# Altium PCB PCB_SOLDER_HOTAIR_STATION_V1.0_06052016.PcbDoc (part 2 of 2)
Units mil, origin at the board's own origin, x right, y up, seen from the top; angles counter-clockwise.
Board outline 3402 x 1915 mil, 2 copper layers (Top Layer, Bottom Layer); 77 components, 65 nets, 244 pads, 86 vias.
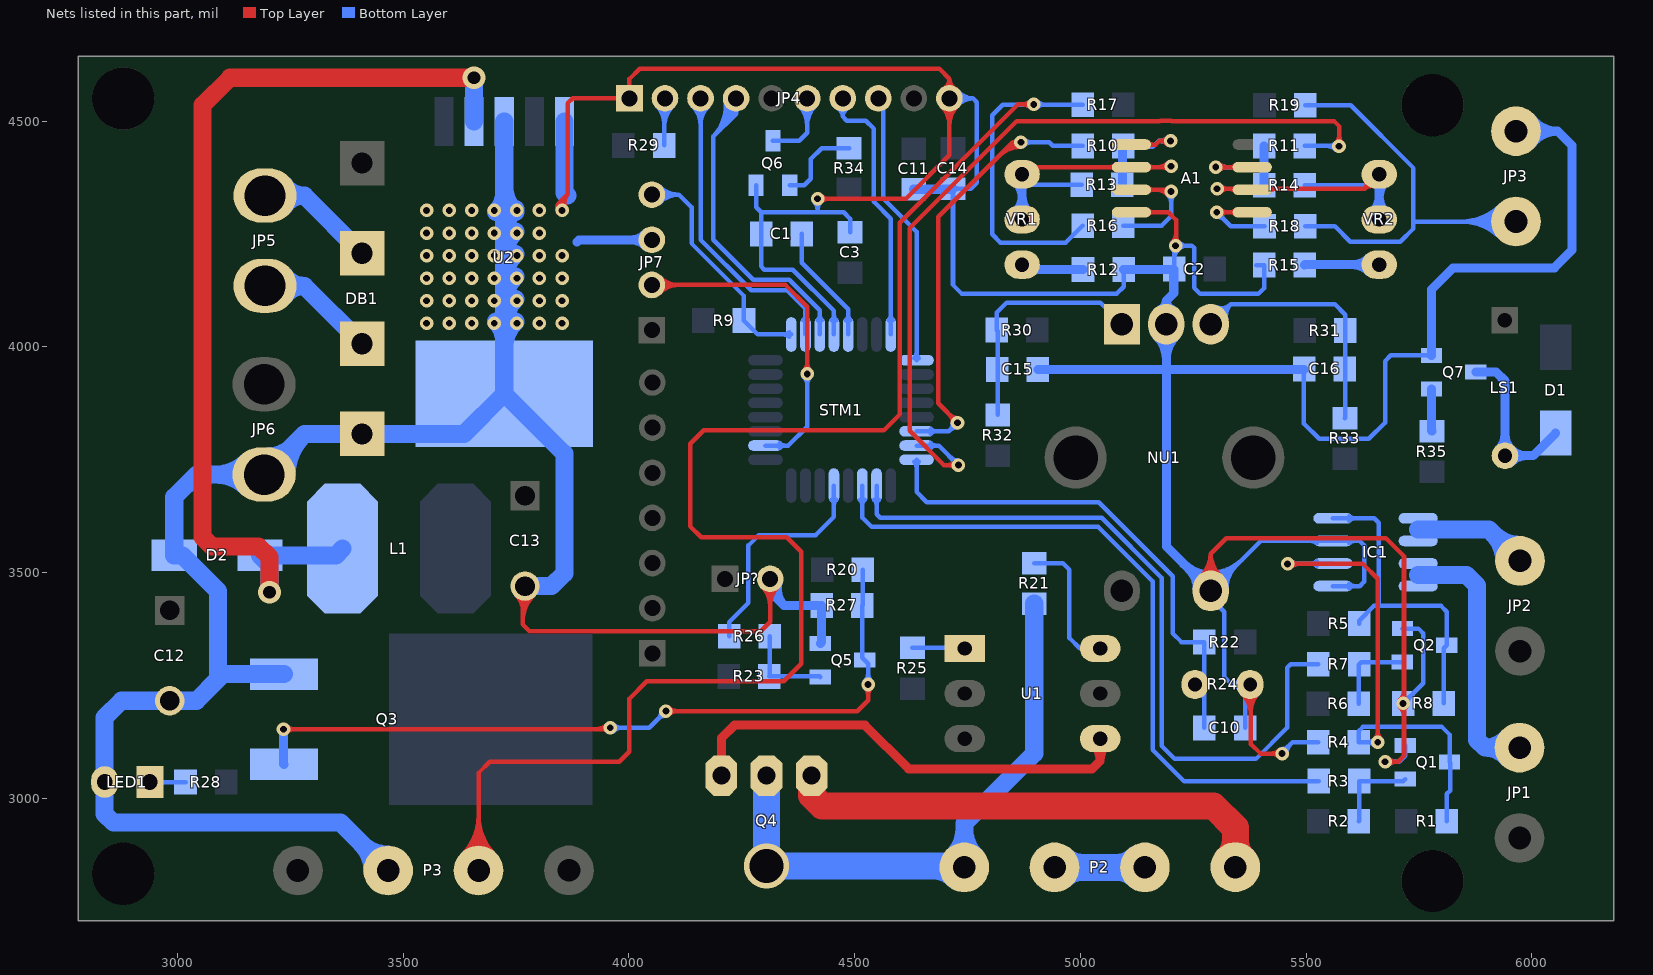
[diagram p2: the nets of this part, all layers, seen from the top]

## Via types
v1: diameter 30, hole 15, Top Layer to Bottom Layer, tented both sides, 84 vias
v2: diameter 50, hole 28, Top Layer to Bottom Layer, tented both sides, 2 vias

## Nets (pads, with @x,y where several pads share a name; then routed paths per layer and width w, separated by ;. In a path a pad name is that pad's centre, name@x,y a point inside that pad or via, vN(x,y) a via of type N, cw(c..) or ccw(c..) an arc to the next point about the centre after c; other vN are vias at no path point) (continued)
GND: A1.4 C1.2 C2.2 C3.2 C10.1 C11.1 C12.2 C13.2 C14.1 C15.2 C16.2 D2.1 DB1.4 IC1.1 IC1.3 JP3.1 JP4.1 JP4.10 JP6.2 JP7.3 JP?.2 LED1.2 NU1.2 NU1.5 P3.2 Q1.3 Q2.3 Q3.3 Q5.3 Q6.3 Q7.3 R4.2 R8.2 R12.2 R15.2 R24.2 R27.2 STM1.4 U2.3 U2.5 U2.6 | length 18137.3
  Top Layer w10: C13.2@3750.55,3450.55 cw(c3715.68,3415.68) 3765,3415.68 cw(c3824.32,3415.68) C13.2@3782.37,3457.63 ; 3765,3391.54 cw(c3848.46,3391.54) C13.2@3789.45,3450.55 ; C13.2@3770,3470 3765,3465 3765,3385 3780,3370 4292,3370 4313,3391 JP?.2@4313,3486 ; v1@3843.28,4297.1 cw(c3859.48,4306.2) 3846.34,4319.34 ; 3848,4321 3865,4338 ; v1(3852,4302) cw(c3871.43,4312.91) 3855.67,4328.67 ; v1@3860.72,4306.9 cw(c3883.37,4319.62) 3865,4338 ; JP?.2@4295.66,3468.66 cw(c4253.79,3426.79) 4313,3426.79 cw(c4372.21,3426.79) JP?.2@4330.34,3468.66 ; JP?.2@4302.73,3475.73 cw(c4277.93,3450.93) 4313,3450.93 cw(c4348.07,3450.93) JP?.2@4323.27,3475.73 ; v1(4418,4328) 4614,4328 4710.03,4424.03 JP4.10@4710.03,4550.37 4710.03,4593.97 ; v1@4425.07,4320.93 cw(c4442.14,4303.86) 4442.14,4328 cw(c4442.14,4352.14) v1@4425.07,4335.07 ; JP4.10@4692.69,4533.03 cw(c4650.82,4491.16) 4710.03,4491.16 cw(c4769.25,4491.16) JP4.10@4727.38,4533.03 ; JP4.10@4697.3,4571.33 ccw(c4683.55,4593.97) 4710.03,4593.97 ; JP4.10@4699.76,4540.1 cw(c4674.96,4515.3) 4710.03,4515.3 cw(c4745.1,4515.3) JP4.10@4720.3,4540.1 ; JP4.10@4722.77,4571.33 cw(c4736.51,4593.97) 4710.03,4593.97 ; A1.4@5113.14,4298 5195,4298 5212,4281 5212,4225 v1(5211,4224) ; A1.4@5149.45,4293.18 cw(c5161.08,4281.56) 5161.08,4298 cw(c5161.08,4314.44) A1.4@5149.45,4302.82 ; v1@5203.93,4231.07 ccw(c5184.44,4250.56) 5212,4250.56 ; 5212,4245.73 ccw(c5232.73,4245.73) v1@5218.07,4231.07 ; NU1.5@5265.73,3490.73 ccw(c5220.77,3541.85) 5288.85,3541.85 ; NU1.5@5272.34,3483.22 ccw(c5240.22,3519.73) 5288.85,3519.73 ccw(c5337.48,3519.73) NU1.5@5305.36,3483.22 ; NU1.5@5288.85,3459.45 5288.85,3541.85 ; NU1.5@5311.97,3490.73 cw(c5356.93,3541.85) 5288.85,3541.85 ; R24.2@5358.32,3231.82 cw(c5310.82,3184.32) 5378,3184.32 ; R24.2@5365.39,3238.89 cw(c5334.96,3208.46) 5378,3208.46 ; R24.2@5376,3252 5378,3250 5378,3120 5399,3099 v1(5447,3099) ; 5378,3193.97 cw(c5431.53,3193.97) R24.2@5393.68,3231.82 ; 5378,3218.12 cw(c5407.38,3218.12) R24.2@5386.61,3238.89 ; v1@5439.93,3091.93 ccw(c5422.86,3074.86) 5422.86,3099 ccw(c5422.86,3123.14) v1@5439.93,3106.07 ; v1(5675,3081) 5704,3081 5717,3094 5717,3536 5677,3576 5323,3576 5288.85,3541.85 ; v1@5682.07,3073.93 cw(c5699.14,3056.86) 5699.14,3081 cw(c5699.14,3105.14) v1@5682.07,3088.07 ; v1@5707.93,3202.93 cw(c5686.03,3181.03) 5717,3181.03 ; v1@5707.93,3217.07 ccw(c5686.03,3238.97) 5717,3238.97 ; 5717,3190.69 cw(c5734.31,3190.69) v1@5722.07,3202.93 ; 5717,3229.31 ccw(c5734.31,3229.31) v1@5722.07,3217.07 ; 3865,4338 3865,4540 3875.37,4550.37 JP4.1@4001.37,4550.37 4001.37,4593.37 4024,4616 4688,4616 4710.03,4593.97
  Bottom Layer w10: Q6.3@4282,4358 4282,4309 4293,4298 ; v1@4410.93,4320.93 cw(c4393.86,4303.86) 4418,4303.86 cw(c4442.14,4303.86) v1@4425.07,4320.93 ; v1(4418,4328) 4418,4298 ; STM1.4@4449.44,4058.71 ccw(c4437.81,4070.34) 4454.25,4070.34 ccw(c4470.7,4070.34) STM1.4@4459.07,4058.71 ; STM1.4@4454.25,4027.32 4454.25,4079.75 4363,4171 4300,4171 4293,4178 C1.2@4293,4250 4293,4298 ; C3.2@4490,4254 4490,4284 4476,4298 4418,4298 ; JP4.10@4710.03,4550.37 4762.26,4550.37 ; C14.1@4714.46,4346.46 cw(c4705.93,4337.93) 4718,4337.93 cw(c4730.07,4337.93) 4721.54,4346.46 cw(c4730.07,4337.93) 4730.07,4350 cw(c4730.07,4362.07) C14.1@4721.54,4353.54 ; JP4.10@4721.21,4541.09 cw(c4740.96,4524.7) 4740.96,4550.37 cw(c4740.96,4576.04) JP4.10@4721.21,4559.65 ; JP4.10@4728.91,4534.71 cw(c4762.26,4507.03) 4762.26,4550.37 ; JP4.10@4728.91,4566.03 ccw(c4762.26,4593.71) 4762.26,4550.37 ; R12.2@5092.46,4167.46 cw(c5083.93,4158.93) 5096,4158.93 cw(c5108.07,4158.93) R12.2@5099.54,4167.46 ; R12.2@5096,4171 5096,4133 5081,4118 4737,4118 4718,4137 C14.1@4718,4350 4757,4350 4770.63,4363.63 4770.63,4542 4762.26,4550.37 ; v1@5203.93,4216.93 cw(c5194.1,4207.1) 5208,4207.1 ; C2.2@5208,4172 5208,4221 v1(5211,4224) 5247,4224 5252,4219 5252,4131 5266,4117 5394,4117 5407,4130 R15.2@5407,4181 R15.2@5390,4181 ; C2.2@5208,4192.62 cw(c5242.38,4192.62) 5218.07,4216.93 cw(c5235.14,4199.86) 5235.14,4224 cw(c5235.14,4248.14) v1@5218.07,4231.07 ; NU1.5@5285.31,3455.91 cw(c5276.78,3447.38) 5288.85,3447.38 cw(c5300.92,3447.38) NU1.5@5292.39,3455.91 ; NU1.5@5288.85,3464.45 ccw(c5288.85,3476.52) 5297.39,3467.98 ccw(c5305.92,3459.45) NU1.5@5293.85,3459.45 ; NU1.5@5288.85,3479.45 ccw(c5288.85,3527.73) 5322.99,3493.59 ; NU1.5@5288.85,3489.45 ccw(c5288.85,3561.88) 5340.06,3510.66 ; NU1.5@5288.85,3499.45 ccw(c5288.85,3596.02) 5357.13,3527.73 ; NU1.5@5313.85,3464.45 cw(c5362.13,3464.45) 5327.99,3498.59 ; NU1.5@5323.85,3464.45 cw(c5396.28,3464.45) 5345.06,3515.66 ; R24.2@5353.77,3240.55 ccw(c5335,3230.88) 5335,3252 ; R24.2@5353.77,3263.45 cw(c5335,3273.12) 5335,3252 ; C10.1@5365,3156 5365,3241 R24.2@5376,3252 5335,3252 ; v1(5447,3099) 5447,3101 5470,3124 R4.2@5527,3124 ; v1@5447,3109 ccw(c5447,3128.31) 5460.66,3114.66 ; v1@5457,3099 cw(c5485.97,3099) 5465.49,3119.49 ; C16.2@5491.46,3946.46 cw(c5482.93,3937.93) 5495,3937.93 cw(c5507.07,3937.93) C16.2@5498.54,3946.46 ; C16.2@5495,3950 5495,3830 5529,3796 5639,3796 5675,3832 5675,3968 5688,3981 Q7.3@5778,3981 ; IC1.3@5523.2,3565.18 ccw(c5511.57,3553.56) 5511.57,3570 ccw(c5511.57,3586.44) IC1.3@5523.2,3574.82 ; IC1.1@5559.51,3470 5619,3470 5629,3480 5629,3560 5619,3570 IC1.3@5559.51,3570 5399.4,3570 NU1.5@5288.85,3459.45 5288.85,3443.15 5319,3413 5319,3268 5335,3252 ; IC1.1@5595.82,3465.18 cw(c5607.45,3453.56) 5607.45,3470 cw(c5607.45,3486.44) IC1.1@5595.82,3474.82 ; IC1.3@5595.82,3565.18 cw(c5607.45,3553.56) 5607.45,3570 cw(c5607.45,3586.44) IC1.3@5595.82,3574.82 ; v1(5675,3081) 5707,3081 5719.66,3093.66 Q1.3@5719.66,3117 ; v1@5682.07,3073.93 cw(c5699.14,3056.86) 5699.14,3081 cw(c5699.14,3105.14) v1@5682.07,3088.07 ; Q2.3@5713.66,3376 5749,3376 5760,3365 5760,3255 v1(5715,3210) ; R8.2@5715,3220 ccw(c5715,3244.14) 5732.07,3227.07 ccw(c5749.14,3210) R8.2@5725,3210 ; Q7.3@5774.46,3977.46 ccw(c5765.93,3968.93) 5765.93,3981 ccw(c5765.93,3993.07) Q7.3@5774.46,3984.54 ; 4293,4298 4418,4298
  Bottom Layer w20: 3885,4232 3890,4237 JP7.3@4051,4237 ; JP7.3@4037.19,4223.19 ccw(c4003.86,4189.86) 4003.86,4237 ccw(c4003.86,4284.14) JP7.3@4037.19,4250.81 ; JP?.2@4312.55,3486.15 ccw(c4346.17,3474.95) 4321.11,3449.89 ; JP?.2@4313,3486 4313,3458 4344,3427 ; JP?.2@4331.53,3479.83 ccw(c4380.5,3463.51) 4344,3427 ; Q5.3@4424,3343 4427,3346 R27.2@4427,3427 4344,3427 ; C11.1@4631,4349 4717,4349 C14.1@4718,4350 ; C15.2@4906,3950 5190.43,3950 ; R12.2@5096,4171 5207,4171 5207,4119 5190.43,4102.43 NU1.2@5190.43,4050 5190.43,3950 ; NU1.2@5169.21,4023.79 cw(c5118,3972.57) 5190.43,3972.57 cw(c5262.85,3972.57) NU1.2@5211.64,4023.79 ; NU1.2@5177.57,4082.11 ccw(c5167.94,4102.42) 5190.43,4102.42 ccw(c5212.91,4102.42) NU1.2@5203.28,4082.11 ; 5229.1,3519.2 ccw(c5288.85,3578.95) NU1.5@5288.85,3494.45 ; 5241.17,3507.13 cw(c5198.5,3464.45) NU1.5@5258.85,3464.45 ; NU1.5@5288.85,3459.45 5190.43,3557.87 5190.43,3950 ; C16.2@5495,3950 5190.43,3950 ; Q7.3@5778,3981 5778,4127 5826,4175 6050,4175 6089,4214 6089,4446 6057.5,4477.5 ; JP3.1@5965,4477.5 6057.5,4477.5 ; JP3.1@6000.41,4449.73 cw(c6057.5,4404.94) 6057.5,4477.5 ; JP3.1@6000.41,4505.27 ccw(c6057.5,4550.06) 6057.5,4477.5
  Bottom Layer w40: JP6.2@3153.72,3688.72 ccw(c3085.43,3620.43) 3085.43,3717 ccw(c3085.43,3813.57) JP6.2@3153.72,3745.28 ; JP6.2@3202,3757 ccw(c3202,3829.43) 3253.21,3778.21 ; Q3.3@3236.13,3275 3101,3275 3090,3264 ; JP6.2@3242,3717 cw(c3362.71,3717) 3277.36,3802.36 ; P3.2@3432,2840 ccw(c3347.5,2840) 3407.25,2899.75 ccw(c3467,2959.5) P3.2@3467,2875 ; P3.2@3467,2840 3361,2946 2858,2946 2839,2965 LED1.2@2839,3036 2839,3179 2876,3216 C12.2@2983,3216 3042,3216 3090,3264 ; v1@3705.54,4055.54 cw(c3660.96,4010.96) U2.6@3724,4010.96 ; v1@3705.54,4298.46 ccw(c3660.96,4343.04) 3724,4343.04 ; U2.6@3724,3996.47 cw(c3807.53,3996.47) v1@3748.46,4055.54 ; 3724,4046.47 cw(c3807.53,4046.47) v1@3748.46,4105.54 ; 3724,4096.47 cw(c3807.53,4096.47) v1@3748.46,4155.54 ; 3724,4146.47 cw(c3807.53,4146.47) v1@3748.46,4205.54 ; 3724,4196.47 cw(c3807.53,4196.47) v1@3748.46,4255.54 ; 3724,4246.47 cw(c3807.53,4246.47) v1@3748.46,4305.54 ; 3724,4357.53 ccw(c3807.53,4357.53) v1@3748.46,4298.46 ; U2.3@3724,4499 U2.6@3724,3896.07 ; C13.2@3770,3470 3829,3470 3857,3498 3857,3763.07 U2.6@3724,3896.07 ; U2.5@3857.86,4499 3857.86,4341.14 3864,4335 ; 3090,3264 3090,3459 3011,3538 D2.1@2993,3538 2993,3667 3043,3717 JP6.2@3192,3717 3282,3807 DB1.4@3409,3807 3634.93,3807 U2.6@3724,3896.07
  other v1: 3552,4052 3602,4052 3652,4052 3702,4052 3752,4052 3802,4052 3852,4052 3552,4102 3602,4102 3652,4102 3702,4102 3752,4102 3802,4102 3852,4102 3552,4152 3602,4152 3652,4152 3702,4152 3752,4152 3802,4152 3852,4152 3552,4202 3602,4202 3652,4202 3702,4202 3752,4202 3802,4202 3852,4202 3552,4252 3602,4252 3652,4252 3702,4252 3752,4252 3802,4252 3552,4302 3602,4302 3652,4302 3702,4302 3752,4302 3802,4302
LCD_AO: JP4.4 STM1.3 | length 984.9
  Bottom Layer w10: 4200.94,4479.94 ccw(c4144.87,4536.02) JP4.4@4223.23,4548.15 ; JP4.4@4213.35,4546.62 cw(c4120.73,4532.28) 4187,4466 ; 4214.88,4493.88 ccw(c4169,4539.75) JP4.4@4233.12,4549.68 ; 4228.82,4507.82 ccw(c4193.14,4543.49) JP4.4@4243,4551.21 ; JP4.4@4237.59,4550.37 4237.59,4516.59 4187,4466 ; STM1.3@4417.94,4058.71 ccw(c4406.31,4070.34) 4422.76,4070.34 ccw(c4439.2,4070.34) STM1.3@4427.57,4058.71 ; STM1.3@4422.76,4027.32 4422.76,4081.24 4355.5,4148.5 4275.78,4148.5 4187,4237.28 4187,4466
LCD_CS: JP4.8 STM1.9 | length 641.1
  Bottom Layer w10: JP4.8@4552.55,4550.37 4563,4539.92 4563,4329.28 4637.32,4254.96 STM1.9@4637.32,3970.24 ; STM1.9@4632.51,3975.05 ccw(c4620.88,3986.68) 4637.32,3986.68 ccw(c4653.77,3986.68) STM1.9@4642.14,3975.05
LCD_SCK: JP4.3 STM1.2 | length 839.9
  Bottom Layer w10: JP4.3@4141.51,4533.03 cw(c4099.64,4491.16) 4158.85,4491.16 cw(c4218.06,4491.16) JP4.3@4176.19,4533.03 ; JP4.3@4148.58,4540.1 cw(c4123.78,4515.3) 4158.85,4515.3 cw(c4193.92,4515.3) JP4.3@4169.12,4540.1 ; JP4.3@4158.85,4550.37 4158.85,4237.15 4271,4125 4350.72,4125 4391.26,4084.46 STM1.2@4391.26,4027.32 ; STM1.2@4386.44,4058.71 ccw(c4374.82,4070.34) 4391.26,4070.34 ccw(c4407.7,4070.34) STM1.2@4396.08,4058.71
LCD_SDA: JP4.7 STM1.8 | length 662.8
  Bottom Layer w10: JP4.7@4462.6,4528.55 cw(c4453.17,4510.19) 4473.81,4510.19 ; JP4.7@4473.81,4550.37 4473.81,4510.19 ; JP4.7@4485.02,4528.55 ccw(c4494.46,4510.19) 4473.81,4510.19 ; STM1.8@4575.42,4058.71 ccw(c4563.79,4070.34) 4580.24,4070.34 ccw(c4596.68,4070.34) STM1.8@4585.05,4058.71 ; STM1.8@4580.24,4027.32 4580.24,4283.76 4543,4321 4543,4483 4525,4501 4483,4501 4473.81,4510.19
MCU_FAN: R3.1 STM1.19 | length 1567.6
  Bottom Layer w10: STM1.19@4512.43,3661.29 cw(c4500.8,3649.66) 4517.24,3649.66 cw(c4533.69,3649.66) STM1.19@4522.06,3661.29 ; STM1.19@4517.24,3692.68 4517.24,3621.76 4538,3601 5039.43,3601 5160,3480.43 5160,3107.72 5229.72,3038 R3.1@5528,3038
MCU_FAN_SYS: R7.1 STM1.18 | length 1675.8
  Bottom Layer w10: STM1.18@4543.92,3661.29 cw(c4532.3,3649.66) 4548.74,3649.66 cw(c4565.18,3649.66) STM1.18@4553.56,3661.29 ; STM1.18@4548.74,3692.68 4548.74,3629.26 4557,3621 5047.72,3621 5180,3488.72 5180,3116 5209,3087 5389,3087 5458,3156 5458,3289 5466,3297 R7.1@5527.5,3297
MCU_HEATER: R26.1 STM1.21 | length 529.5
  Bottom Layer w10: R26.1@4222,3359 4222,3390 4265,3433 4265,3560 4288,3583 4414,3583 4454.25,3623.25 STM1.21@4454.25,3692.68 ; STM1.21@4449.44,3661.29 cw(c4437.81,3649.66) 4454.25,3649.66 cw(c4470.7,3649.66) STM1.21@4459.07,3661.29
NetA1_1: A1.1 R10.1 R13.1 | length 407.2
  Top Layer w10: A1.1@5113.14,4448 5167,4448 5175,4456 v1(5200,4456) ; A1.1@5149.45,4443.18 cw(c5161.08,4431.56) 5161.08,4448 cw(c5161.08,4464.44) A1.1@5149.45,4452.82 ; v1@5192.93,4448.93 ccw(c5175.86,4431.86) 5175.86,4456 ccw(c5175.86,4480.14) v1@5192.93,4463.07
  Bottom Layer w10: R10.1@5093,4443 5161,4443 5174,4456 v1(5200,4456) ; R10.1@5096.54,4439.46 cw(c5105.07,4430.93) 5105.07,4443 cw(c5105.07,4455.07) R10.1@5096.54,4446.54 ; v1@5192.93,4448.93 ccw(c5175.86,4431.86) 5175.86,4456 ccw(c5175.86,4480.14) v1@5192.93,4463.07
  Bottom Layer w20: R13.1@5093,4359 R10.1@5093,4443
NetA1_2: A1.2 R13.2 VR1.2 VR1.3 | length 809.8
  Top Layer w10: VR1.3@4871,4382 4887,4398 A1.2@5113.14,4398 5199,4398 v1(5201,4400) ; A1.2@5076.83,4393.18 ccw(c5065.2,4381.56) 5065.2,4398 ccw(c5065.2,4414.44) A1.2@5076.83,4402.82 ; A1.2@5149.45,4393.18 cw(c5161.08,4381.56) 5161.08,4398 cw(c5161.08,4414.44) A1.2@5149.45,4402.82 ; 5172.03,4398 ccw(c5172.03,4428.97) v1@5193.93,4407.07 ; 5181.69,4398 cw(c5181.69,4380.69) v1@5193.93,4392.93
  Bottom Layer w10: VR1.3@4871,4377 cw(c4871,4364.93) 4879.54,4373.46 cw(c4888.07,4382) VR1.3@4876,4382 ; VR1.3@4871,4382 4894,4359 R13.2@5003,4359
  Bottom Layer w20: VR1.2@4855.8,4297.2 ccw(c4819.1,4333.9) 4871,4333.9 ccw(c4922.9,4333.9) VR1.2@4886.2,4297.2 ; VR1.3@4855.8,4366.8 cw(c4819.1,4330.1) 4871,4330.1 ; VR1.2@4871,4282 VR1.3@4871,4382
NetA1_3: A1.3 R16.1 | length 360.9
  Top Layer w10: A1.3@5113.14,4348 5187,4348 5191,4344 v1(5201,4344) ; A1.3@5149.45,4343.18 cw(c5161.08,4331.56) 5161.08,4348 cw(c5161.08,4364.44) A1.3@5149.45,4352.82 ; 5167.2,4348 cw(c5167.2,4310.2) v1@5193.93,4336.93 ; 5186.51,4348 ccw(c5186.51,4358.49) v1@5193.93,4351.07
  Bottom Layer w10: R16.1@5095,4268 5180,4268 5201,4289 v1(5201,4344) ; v1@5193.93,4336.93 cw(c5176.86,4319.86) 5201,4319.86 cw(c5225.14,4319.86) v1@5208.07,4336.93
NetA1_5: A1.5 R18.1 | length 299.4
  Top Layer w10: v1(5302,4298) A1.5@5380.86,4298 ; v1@5309.07,4290.93 cw(c5326.14,4273.86) 5326.14,4298 cw(c5326.14,4322.14) v1@5309.07,4305.07 ; A1.5@5344.55,4293.18 ccw(c5332.92,4281.56) 5332.92,4298 ccw(c5332.92,4314.44) A1.5@5344.55,4302.82
  Bottom Layer w10: v1@5302,4288 cw(c5302,4263.86) 5319.07,4280.93 cw(c5336.14,4298) v1@5312,4298 ; v1(5302,4298) 5333,4267 R18.1@5408,4267
NetA1_6: A1.6 R14.2 VR2.2 VR2.3 | length 903
  Top Layer w10: v1(5303,4350) 5630,4350 ; v1@5310.07,4342.93 cw(c5327.14,4325.86) 5327.14,4350 cw(c5327.14,4374.14) v1@5310.07,4357.07 ; 5328.09,4350 cw(c5328.09,4326.73) A1.6@5344.55,4343.18 ; A1.6@5417.17,4343.18 cw(c5433.63,4326.73) 5433.63,4350 ; VR2.3@5631.87,4367.62 cw(c5620.03,4359.97) 5630,4350 ; VR2.3@5649.25,4355.96 ccw(c5645.27,4334.73) 5630,4350 ; VR2.3@5662,4382 5630,4350
  Bottom Layer w10: R14.2@5497,4358 5638,4358 VR2.3@5662,4382 ; VR2.3@5657,4382 cw(c5644.93,4382) 5653.46,4373.46 cw(c5662,4364.93) VR2.3@5662,4377
  Bottom Layer w20: VR2.2@5646.8,4297.2 ccw(c5610.1,4333.9) 5662,4333.9 ccw(c5713.9,4333.9) VR2.2@5677.2,4297.2 ; VR2.2@5662,4282 VR2.3@5662,4382 ; 5662,4330.1 cw(c5713.9,4330.1) VR2.3@5677.2,4366.8
NetA1_7: A1.7 R11.2 R14.1 | length 381.5
  Top Layer w10: v1(5300,4398) A1.7@5380.86,4398 ; v1@5307.07,4390.93 cw(c5324.14,4373.86) 5324.14,4398 cw(c5324.14,4422.14) v1@5307.07,4405.07 ; A1.7@5344.55,4393.18 ccw(c5332.92,4381.56) 5332.92,4398 ccw(c5332.92,4414.44) A1.7@5344.55,4402.82
  Bottom Layer w10: v1(5300,4398) 5393,4398 5405,4410 5407,4410 ; v1@5307.07,4390.93 cw(c5324.14,4373.86) 5324.14,4398 cw(c5324.14,4422.14) v1@5307.07,4405.07
  Bottom Layer w20: R14.1@5407,4358 5407,4410 R11.2@5407,4445
NetC1_1: C1.1 STM1.5 | length 291.1
  Bottom Layer w10: C1.1@4383,4250 4383,4186 4485.75,4083.25 STM1.5@4485.75,4027.32 ; STM1.5@4480.93,4058.71 ccw(c4469.3,4070.34) 4485.75,4070.34 ccw(c4502.19,4070.34) STM1.5@4490.56,4058.71
NetC15_1: C15.1 NU1.1 R30.2 R32.2 | length 533.8
  Bottom Layer w10: R32.2@4817,3849 4817,4035 R30.2@4815,4037 4815,4076 4837,4098 5044,4098 NU1.1@5092,4050
NetC16_1: C16.1 NU1.3 R31.2 R33.1 | length 672.6
  Bottom Layer w10: NU1.3@5288.85,4050 5332.85,4094 ; NU1.3@5298.05,4078.25 ccw(c5306.27,4099.04) 5322.08,4083.23 ; NU1.3@5301.72,4087.55 ccw(c5312.37,4114.48) 5332.85,4094 ; NU1.3@5313.36,4059.94 cw(c5335.97,4064.5) 5319.66,4080.81 ; NU1.3@5323.16,4061.92 cw(c5357.93,4068.92) 5332.85,4094 ; R33.1@5586,3842 5587,3843 R31.2@5587,4036 5587,4071 5564,4094 5332.85,4094
NetD1_1: D1.1 LS1.2 Q7.2 | length 519.3
  Bottom Layer w20: Q7.2@5876.21,3944 5921,3944 5940.73,3924.27 LS1.2@5940.73,3758.79 6002.79,3758.79 D1.1@6053,3809 ; LS1.2@5926.93,3772.6 ccw(c5893.59,3805.94) 5940.73,3805.94 ccw(c5987.88,3805.94) 5954.54,3772.6 ccw(c5987.88,3805.94) 5987.88,3758.79 ccw(c5987.88,3711.65) LS1.2@5954.54,3744.99
NetD2_2: D2.2 L1.1 U2.2 | length 2203.8
  Top Layer w40: v2(3204,3456) 3204,3534 3180,3558 3077,3558 3056,3579 3056,4535 3117,4596 v2(3657,4596)
  Bottom Layer w40: v2(3204,3456) 3204,3517 D2.2@3183,3538 3351,3538 L1.1@3366,3553 ; v2(3657,4596) 3657.07,4595.93 U2.2@3657.07,4499
NetDB1_2: DB1.2 JP5.1 | length 371.7
  Bottom Layer w40: JP5.1@3194,4335 3281,4335 ; JP5.1@3236.73,4312 cw(c3281,4280.89) 3281,4335 ; JP5.1@3236.73,4358 ccw(c3281,4389.11) 3281,4335 ; DB1.2@3409,4207 3281,4335
NetDB1_3: DB1.3 JP5.2 | length 371.7
  Bottom Layer w40: JP5.2@3194,4135 3281,4135 ; JP5.2@3236.73,4112 cw(c3281,4080.89) 3281,4135 ; JP5.2@3236.73,4158 ccw(c3281,4189.11) 3281,4135 ; DB1.3@3409,4007 3281,4135
NetIC1_2: IC1.2 Q1.2 R1.2 R4.1 | length 1328.2
  Top Layer w10: v1(5459,3519) 5626,3519 5659,3486 v1(5659,3124) ; v1@5466.07,3511.93 cw(c5483.14,3494.86) 5483.14,3519 cw(c5483.14,3543.14) v1@5466.07,3526.07 ; v1@5651.93,3131.07 ccw(c5634.86,3148.14) 5659,3148.14 ccw(c5683.14,3148.14) v1@5666.07,3131.07
  Bottom Layer w10: v1(5459,3519) 5460,3520 IC1.2@5559.51,3520 ; v1@5466.07,3511.93 cw(c5485.56,3492.44) 5485.56,3520 ; v1@5466.07,3526.07 ccw(c5480.73,3540.73) 5480.73,3520 ; IC1.2@5523.2,3515.18 ccw(c5511.57,3503.56) 5511.57,3520 ccw(c5511.57,3536.44) IC1.2@5523.2,3524.82 ; v1@5651.93,3116.93 ccw(c5634.86,3099.86) 5634.86,3124 ccw(c5634.86,3148.14) v1@5651.93,3131.07 ; v1(5659,3124) R4.1@5617,3124 5617,3149 5626,3158 5801,3158 5817.88,3141.12 Q1.2@5817.88,3080 5819,3078.88 5819,3017 5812,3010 R1.2@5812,2949
NetIC1_4: IC1.4 Q2.2 R5.2 R8.1 | length 741.1
  Bottom Layer w10: IC1.4@5559.51,3620 5651,3620 5661,3610 5661,3426 ; IC1.4@5595.82,3615.18 cw(c5607.45,3603.56) 5607.45,3620 cw(c5607.45,3636.44) IC1.4@5595.82,3624.82 ; R5.2@5617.5,3387 5617.5,3393.5 5650,3426 5661,3426 ; R8.1@5805,3210 5805,3332.12 Q2.2@5811.88,3339 5811.88,3413.12 5799,3426 5661,3426
NetIC1_5: IC1.5 IC1.6 JP2.1 | length 386.8
  Bottom Layer w40: 5748.49,3595 5905,3595 JP2.1@5974,3526 ; JP2.1@5939,3526 ccw(c5854.5,3526) 5914.25,3585.75 ccw(c5974,3645.5) JP2.1@5974,3561
NetIC1_7: IC1.7 IC1.8 JP1.1 | length 698.2
  Bottom Layer w40: 5748.49,3495 5855,3495 5879,3471 5879,3129 5896,3112 ; JP1.1@5946.63,3088.99 ccw(c5896,3044.81) 5896,3112 ; JP1.1@5946.63,3135.01 cw(c5896,3179.19) 5896,3112 ; JP1.1@5973,3112 5896,3112
NetJP3_2: JP3.2 R18.2 R19.2 | length 1379.7
  Bottom Layer w10: R18.2@5498,4267 5564,4267 5598,4233 5709,4233 5738,4262 5738,4277.5 ; R19.2@5498,4535 5599,4535 5738,4396 5738,4277.5 ; JP3.2@5929.64,4242.14 ccw(c5844.29,4156.79) 5844.29,4277.5 ccw(c5844.29,4398.21) JP3.2@5929.64,4312.86 ; JP3.2@5936.72,4249.22 ccw(c5868.43,4180.93) 5868.43,4277.5 ccw(c5868.43,4374.07) JP3.2@5936.72,4305.78 ; JP3.2@5943.79,4256.29 ccw(c5892.57,4205.07) 5892.57,4277.5 ccw(c5892.57,4349.93) JP3.2@5943.79,4298.71 ; JP3.2@5965,4277.5 5738,4277.5
NetJP4_2: JP4.2 R29.1 | length 253.4
  Bottom Layer w10: JP4.2@4062.77,4533.03 cw(c4025.99,4496.25) 4078,4496.25 ; JP4.2@4069.84,4540.1 cw(c4050.13,4520.39) 4078,4520.39 ; R29.1@4078,4446 4078,4548.26 JP4.2@4080.11,4550.37 ; 4078,4486.06 cw(c4144.42,4486.06) JP4.2@4097.45,4533.03 ; 4078,4510.2 cw(c4120.28,4510.2) JP4.2@4090.38,4540.1
NetJP4_6: JP4.6 Q6.2 | length 307.9
  Bottom Layer w10: Q6.2@4319,4456.21 4377.21,4456.21 4395.07,4474.07 JP4.6@4395.07,4550.37 ; JP4.6@4377.73,4533.03 cw(c4335.86,4491.16) 4395.07,4491.16 cw(c4454.29,4491.16) JP4.6@4412.41,4533.03 ; JP4.6@4384.8,4540.1 cw(c4360,4515.3) 4395.07,4515.3 cw(c4430.14,4515.3) JP4.6@4405.34,4540.1
NetLED1_1: LED1.1 R28.1 | length 79
  Bottom Layer w10: LED1.1@2939,3036 R28.1@3018,3036
NetP2_1: P2.1 Q4.2 R21.2 | length 1475.6
  Bottom Layer w40: P2.1@4718.25,2871.75 ccw(c4658.5,2931.5) 4743,2931.5 ccw(c4827.5,2931.5) P2.1@4767.75,2871.75 ; P2.1@4740,2850 P2.1@4743,2847 4743,2944 4898,3099 R21.2@4898,3431
  Bottom Layer w60: Q4.2@4305,3050 Q4.2@4305,2850 P2.1@4740,2850 ; 4675.4,2850 cw(c4675.4,2779.4) P2.1@4725.32,2829.32
NetP2_2: P2.2 P2.3 | length 389.7
  Bottom Layer w40: P2.3@5143,2847 P2.3@5143.06,2847.06
  Bottom Layer w60: P2.2@4943,2847 P2.3@5143,2847 ; P2.2@4960.68,2829.32 cw(c5003.36,2786.64) 5003.36,2847 cw(c5003.36,2907.36) P2.2@4960.68,2864.68 ; 5082.56,2847 ccw(c5082.56,2907.57) P2.3@5125.38,2864.74 ; 5082.86,2847 cw(c5082.86,2786.86) P2.3@5125.38,2829.38
NetP2_4: P2.4 Q4.1 | length 1194
  Top Layer w60: Q4.1@4405,3050 4405,3006 4428,2983 5295,2983 5343.39,2934.61 P2.4@5343.39,2847.39 ; P2.4@5325.72,2865.07 ccw(c5283.04,2907.75) 5343.39,2907.75 ccw(c5403.75,2907.75) P2.4@5361.07,2865.07
NetQ1_1: Q1.1 R2.1 R3.2 | length 192.8
  Bottom Layer w10: R2.1@5617,2949 5618,2950 R3.2@5618,3038 5714.85,3038 Q1.1@5719.45,3042.6
NetQ2_1: Q2.1 R6.1 R7.2 | length 185.8
  Bottom Layer w10: R6.1@5616.5,3209.5 5616.5,3296 R7.2@5617.5,3297 5622.1,3301.6 Q2.1@5713.45,3301.6
NetQ3_1: Q3.1 Q5.2 R20.2 R27.1 | length 1960.2
  Top Layer w10: v1(3235,3153) 3956,3153 v1(3959,3156) ; v1@3242.07,3145.93 cw(c3259.14,3128.86) 3259.14,3153 cw(c3259.14,3177.14) v1@3242.07,3160.07 ; 3927.62,3153 ccw(c3927.62,3187.38) v1@3951.93,3163.07 ; 3942.1,3153 cw(c3942.1,3139.1) v1@3951.93,3148.93 ; v1(4082,3193) 4506,3193 4530,3217 v1(4530,3252) ; v1@4089.07,3185.93 cw(c4106.14,3168.86) 4106.14,3193 cw(c4106.14,3217.14) v1@4089.07,3200.07 ; v1@4522.93,3244.93 cw(c4505.86,3227.86) 4530,3227.86 cw(c4554.14,3227.86) v1@4537.07,3244.93
  Bottom Layer w10: v1(3959,3156) 4045,3156 v1(4082,3193) ; v1@3966.07,3148.93 cw(c3983.14,3131.86) 3983.14,3156 cw(c3983.14,3180.14) v1@3966.07,3163.07 ; v1@4072,3193 cw(c4047.86,3193) 4064.93,3175.93 cw(c4082,3158.86) v1@4082,3183 ; R20.2@4518,3506 4518,3428 R27.1@4517,3427 4517,3311.21 Q5.2@4522.21,3306 4530,3298.21 v1(4530,3252) ; v1@4522.93,3259.07 ccw(c4505.86,3276.14) 4530,3276.14 ccw(c4554.14,3276.14) v1@4537.07,3259.07
  Bottom Layer w20: v1(3235,3153) 3235,3076.13 Q3.1@3236.13,3075
NetQ4_3: Q4.3 U1.4 | length 1106.5
  Top Layer w20: Q4.3@4205,3050 4205,3133 4234,3162 4523,3162 4620,3065 5026,3065 5044,3083 U1.4@5044,3132 ; U1.4@5029.86,3117.86 cw(c4995.72,3083.72) 5044,3083.72 cw(c5092.28,3083.72) U1.4@5058.14,3117.86
NetQ5_1: Q5.1 R23.1 R26.2 | length 202.8
  Bottom Layer w10: R26.2@4312,3359 4312,3271 R23.1@4311,3270 4422.39,3270 Q5.1@4423.79,3268.6
NetQ6_1: Q6.1 R34.2 | length 191.4
  Bottom Layer w10: Q6.1@4356.4,4357.79 4388.79,4357.79 4403,4372 4403,4416 4427,4440 R34.2@4488,4440
NetQ7_1: Q7.1 R35.1 | length 94.1
  Bottom Layer w20: Q7.1@5777.79,3906.6 5777.79,3814.21 R35.1@5779,3813
NetR12_1: R12.1 VR1.1 | length 139.6
  Bottom Layer w20: VR1.1@4871,4182 4882,4171 R12.1@5006,4171
NetR15_1: R15.1 VR2.1 | length 246.9
  Bottom Layer w20: R15.1@5497,4181 5498,4182 VR2.1@5662,4182 ; VR2.1@5638.93,4166.8 ccw(c5602.23,4130.1) 5602.23,4182 ccw(c5602.23,4233.9) VR2.1@5638.93,4197.2
NetR21_1: R21.1 U1.6 | length 312.7
  Bottom Layer w10: R21.1@4898,3521 4961,3521 4976,3506 4976,3355 4999,3332 U1.6@5044,3332
NetR25_2: R25.2 U1.1 | length 116.4
  Bottom Layer w10: R25.2@4628,3333 4743,3333 U1.1@4744,3332
RST: JP7.4 R9.2 STM1.1 | length 690.1
  Bottom Layer w10: JP7.4@4051,4337 4111,4337 4138.85,4309.15 4138.85,4228.87 4255,4112.72 R9.2@4255,4058 4285.68,4027.32 STM1.1@4359.76,4027.32 ; JP7.4@4061.27,4326.73 cw(c4086.07,4301.93) 4086.07,4337 cw(c4086.07,4372.07) JP7.4@4061.27,4347.27 ; JP7.4@4068.34,4319.66 cw(c4110.21,4277.79) 4110.21,4337 cw(c4110.21,4396.21) JP7.4@4068.34,4354.34 ; STM1.1@4354.95,4022.51 ccw(c4343.32,4010.88) 4343.32,4027.32 ccw(c4343.32,4043.77) STM1.1@4354.95,4032.14
SEN_SOL: P3.3 R16.2 R17.2 | length 4428.5
  Top Layer w10: P3.3@3631.71,2875.42 ccw(c3546.35,2960.77) 3667.06,2960.77 ccw(c3787.77,2960.77) P3.3@3702.42,2875.42 ; P3.3@3638.78,2868.35 ccw(c3570.49,2936.63) 3667.06,2936.63 ccw(c3763.63,2936.63) P3.3@3695.35,2868.35 ; P3.3@3645.85,2861.28 ccw(c3594.64,2912.49) 3667.06,2912.49 ccw(c3739.49,2912.49) P3.3@3688.28,2861.28 ; P3.3@3667.06,2840.06 3667.06,3056.06 3692,3081 3979,3081 4001,3103 4001,3220 4040,3259 4107,3259 4343,3259 4382,3298 4382,3546 4350,3578 4160,3578 4136,3602 ; 4136,3644 4136,3602 ; v1@4889.93,4529.93 ccw(c4872.86,4512.86) 4872.86,4537 ccw(c4872.86,4561.14) v1@4889.93,4544.07 ; v1(4897,4537) 4862,4537 4600,4275 4600,3850 4565,3815 4166,3815 4136,3785 4136,3602
  Bottom Layer w10: 4870.44,4536 ccw(c4870.44,4563.56) v1@4889.93,4544.07 ; 4875.27,4536 cw(c4875.27,4515.27) v1@4889.93,4529.93 ; v1@4904.07,4529.93 cw(c4918.73,4515.27) 4918.73,4536 ; v1@4904.07,4544.07 ccw(c4923.56,4563.56) 4923.56,4536 ; R16.2@5005,4268 4968,4231 4823,4231 4805,4249 4805,4513 4828,4536 R17.2@5005,4536
SWIM: JP7.2 STM1.26 | length 989.1
  Top Layer w10: JP7.2@4051,4137 4347,4137 4395,4089 v1(4395,3940) ; JP7.2@4061.27,4126.73 cw(c4086.07,4101.93) 4086.07,4137 cw(c4086.07,4172.07) JP7.2@4061.27,4147.27 ; JP7.2@4068.34,4119.66 cw(c4110.21,4077.79) 4110.21,4137 cw(c4110.21,4196.21) JP7.2@4068.34,4154.34 ; v1@4387.93,3947.07 ccw(c4370.86,3964.14) 4395,3964.14 ccw(c4419.14,3964.14) v1@4402.07,3947.07
  Bottom Layer w10: STM1.26@4302.68,3781.26 4353.03,3781.26 4395,3823.23 v1(4395,3940) ; STM1.26@4334.07,3776.44 cw(c4345.7,3764.82) 4345.7,3781.26 cw(c4345.7,3797.7) STM1.26@4334.07,3786.08 ; v1@4387.93,3932.93 cw(c4370.86,3915.86) 4395,3915.86 cw(c4419.14,3915.86) v1@4402.07,3932.93
TEMP_GUN: R11.1 STM1.15 | length 2053.4
  Top Layer w10: v1@4722.93,3730.93 ccw(c4705.86,3713.86) 4705.86,3738 ccw(c4705.86,3762.14) v1@4722.93,3745.07 ; v1(4730,3738) 4698,3738 4622,3814 4622,4263 4859,4500 5175.57,4500 5176.57,4501 5201.43,4501 5202.43,4500 5562,4500 5574,4488 5574,4445 v1(5573,4444) ; v1@5565.93,4451.07 ccw(c5546.44,4470.56) 5574,4470.56 ; 5574,4465.73 ccw(c5594.73,4465.73) v1@5580.07,4451.07
  Bottom Layer w10: STM1.15@4637.32,3781.26 4686.74,3781.26 v1(4730,3738) ; STM1.15@4668.71,3776.44 cw(c4680.34,3764.82) 4680.34,3781.26 cw(c4680.34,3797.7) STM1.15@4668.71,3786.08 ; v1@4720,3738 ccw(c4695.86,3738) 4712.93,3755.07 ccw(c4730,3772.14) v1@4730,3748 ; R11.1@5497,4445 5572,4445 v1(5573,4444) ; 5546.44,4445 cw(c5546.44,4417.44) v1@5565.93,4436.93 ; 5551.27,4445 ccw(c5551.27,4465.73) v1@5565.93,4451.07
TEMP_SOL: R10.2 STM1.14 | length 1192.3
  Top Layer w10: v1@4718,3832 ccw(c4693.86,3832) 4710.93,3849.07 ccw(c4728,3866.14) v1@4728,3842 ; v1(4728,3832) 4685,3875 4685,4288 4850,4453 v1(4868.37,4453) ccw(c4868.37,4408.65) 4837.01,4440.01 ; 4819.94,4422.94 cw(c4868.37,4374.51) v1@4868.37,4443
  Bottom Layer w10: STM1.14@4637.32,3812.76 4708.76,3812.76 v1(4728,3832) ; STM1.14@4668.71,3807.94 cw(c4680.34,3796.31) 4680.34,3812.76 cw(c4680.34,3829.2) STM1.14@4668.71,3817.57 ; v1@4718,3832 cw(c4693.86,3832) 4710.93,3814.93 cw(c4728,3797.86) v1@4728,3822 ; v1(4868.37,4453) 4931,4453 4939,4445 R10.2@5005,4445 ; v1@4875.44,4445.93 cw(c4892.51,4428.86) 4892.51,4453 cw(c4892.51,4477.14) v1@4875.44,4460.07
TEMP_SYS: C10.2 R22.2 R24.1 STM1.16 | length 1154.2
  Bottom Layer w10: STM1.16@4632.51,3744.95 cw(c4620.88,3733.32) 4637.32,3733.32 cw(c4653.77,3733.32) STM1.16@4642.14,3744.95 ; STM1.16@4637.32,3749.76 4637.32,3678.68 4660,3656 5041,3656 5205,3492 5205,3365 5224,3346 R22.2@5275,3346 5275,3273 R24.1@5254,3252 5275,3231 C10.2@5275,3156
pads on no net: NU1.6 NU1.7 STM1.11 STM1.12 STM1.13 STM1.17 U1.3 U1.5

## Polygon pours and split planes (outlines as drawn)
GND on Bottom Layer "bot" (hatched 90Degree grid 20 track 8, remove dead copper, pour order 2): 2780,4644 2780,2729 6182,2729 6182,4644
GND on Top Layer "bot" (hatched 90Degree grid 20 track 8, remove dead copper, pour order 4): 2780,4644 2780,2729 6182,2729 6182,4644

## Keep-outs
Keep-Out Layer:
  the board outline again, w7

## Other copper
Top Layer:
  rectangle net GND: 3523,3782 3920,4357
Bottom Layer:
  rectangle net GND: 3523,3782 3920,4357
  rectangle net CTRL_SOL: 3811,2837 3920,3082

## Silkscreen, mask and mechanical layers (free items; w line width, h text height)
Bottom Solder:
  rectangle: 3811,2837 3920,3082

## Text inside footprints (layer, text, board x,y; h text height)
C12: Top Overlay "+" at 2953,3476 h80 r90
C13: Top Overlay "+" at 3740,3730 h80 r90
DB1: Top Overlay "-" at 3473,3826 h56.25 r270; Top Overlay "+" at 3472,4426 h56.25 r270; Top Overlay "~" at 3444,4025 h56.25 r270; Top Overlay "~" at 3444,4228 h56.25 r270
LS1: Top Overlay "+" at 5912.23,4003.29 h60 r270